# Altium PCB Connector to Connector.PcbDoc
Units mil, origin at the board's own origin, x right, y up, seen from the top; angles counter-clockwise.
Board outline 5065 x 3395 mil, 2 copper layers (Top Layer, Bottom Layer); 3 components, 95 nets, 232 pads, 75 vias.
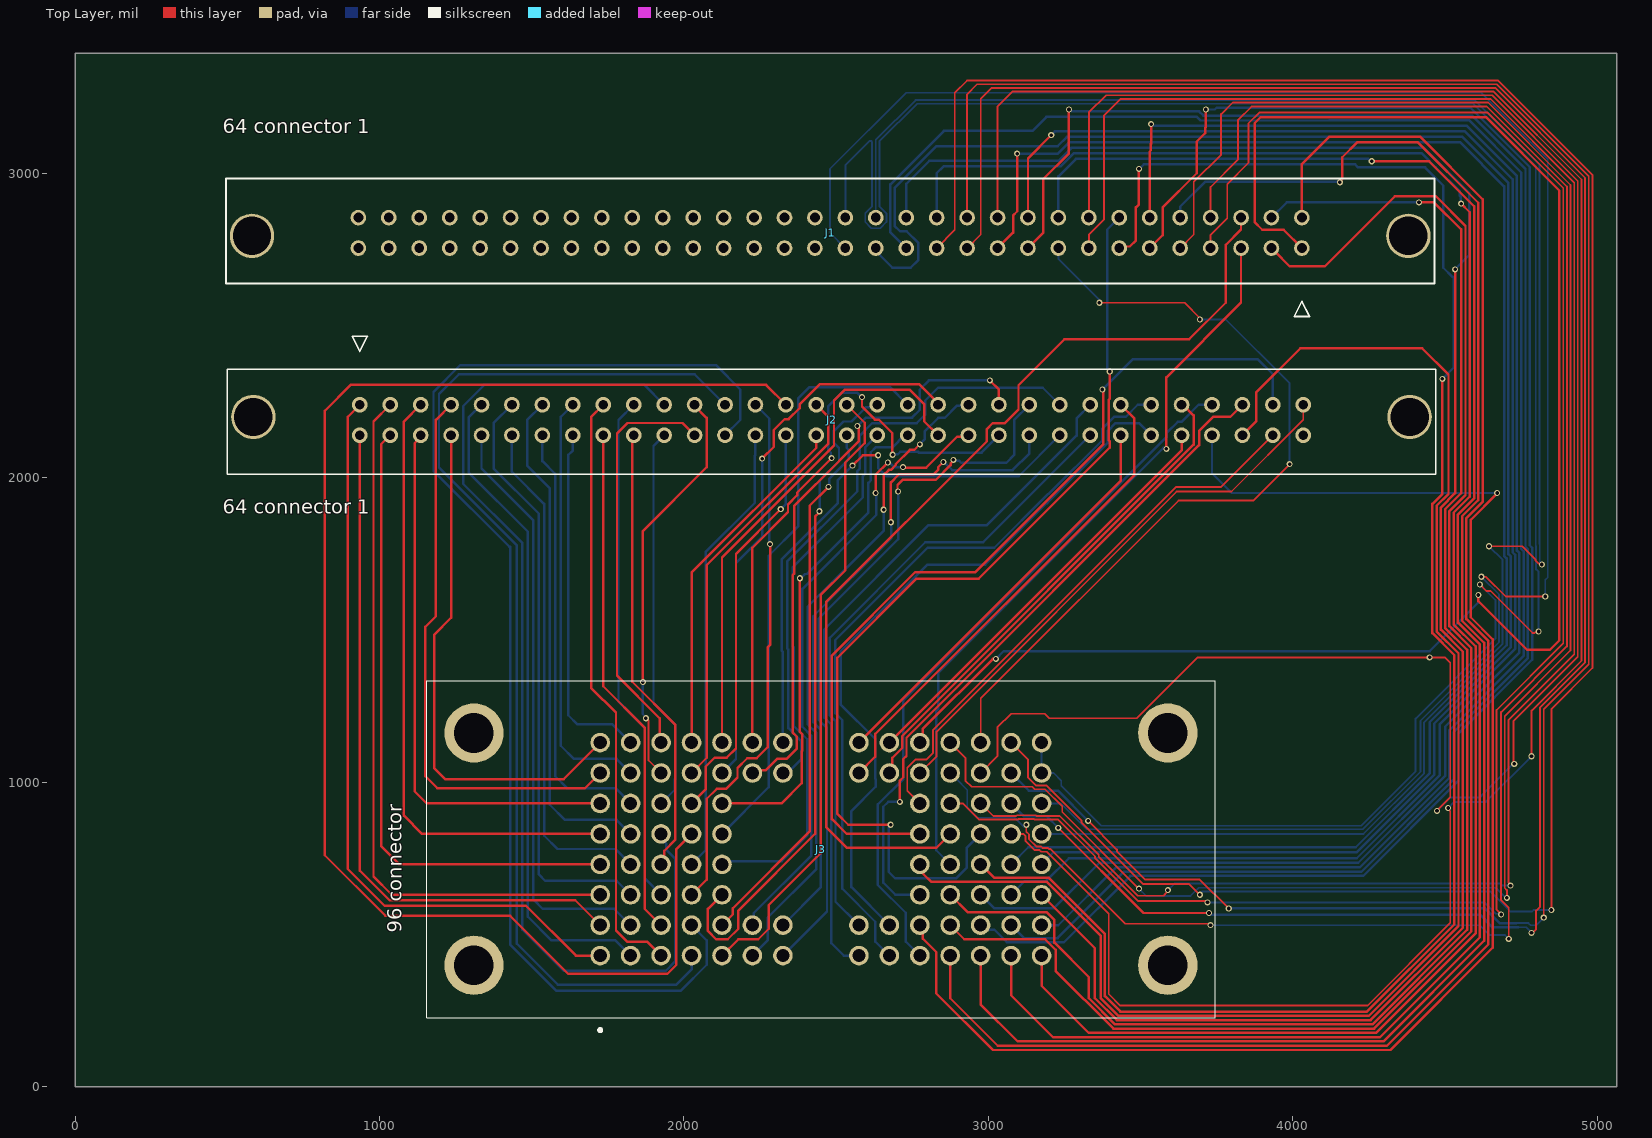
[diagram p0: Top Layer view]
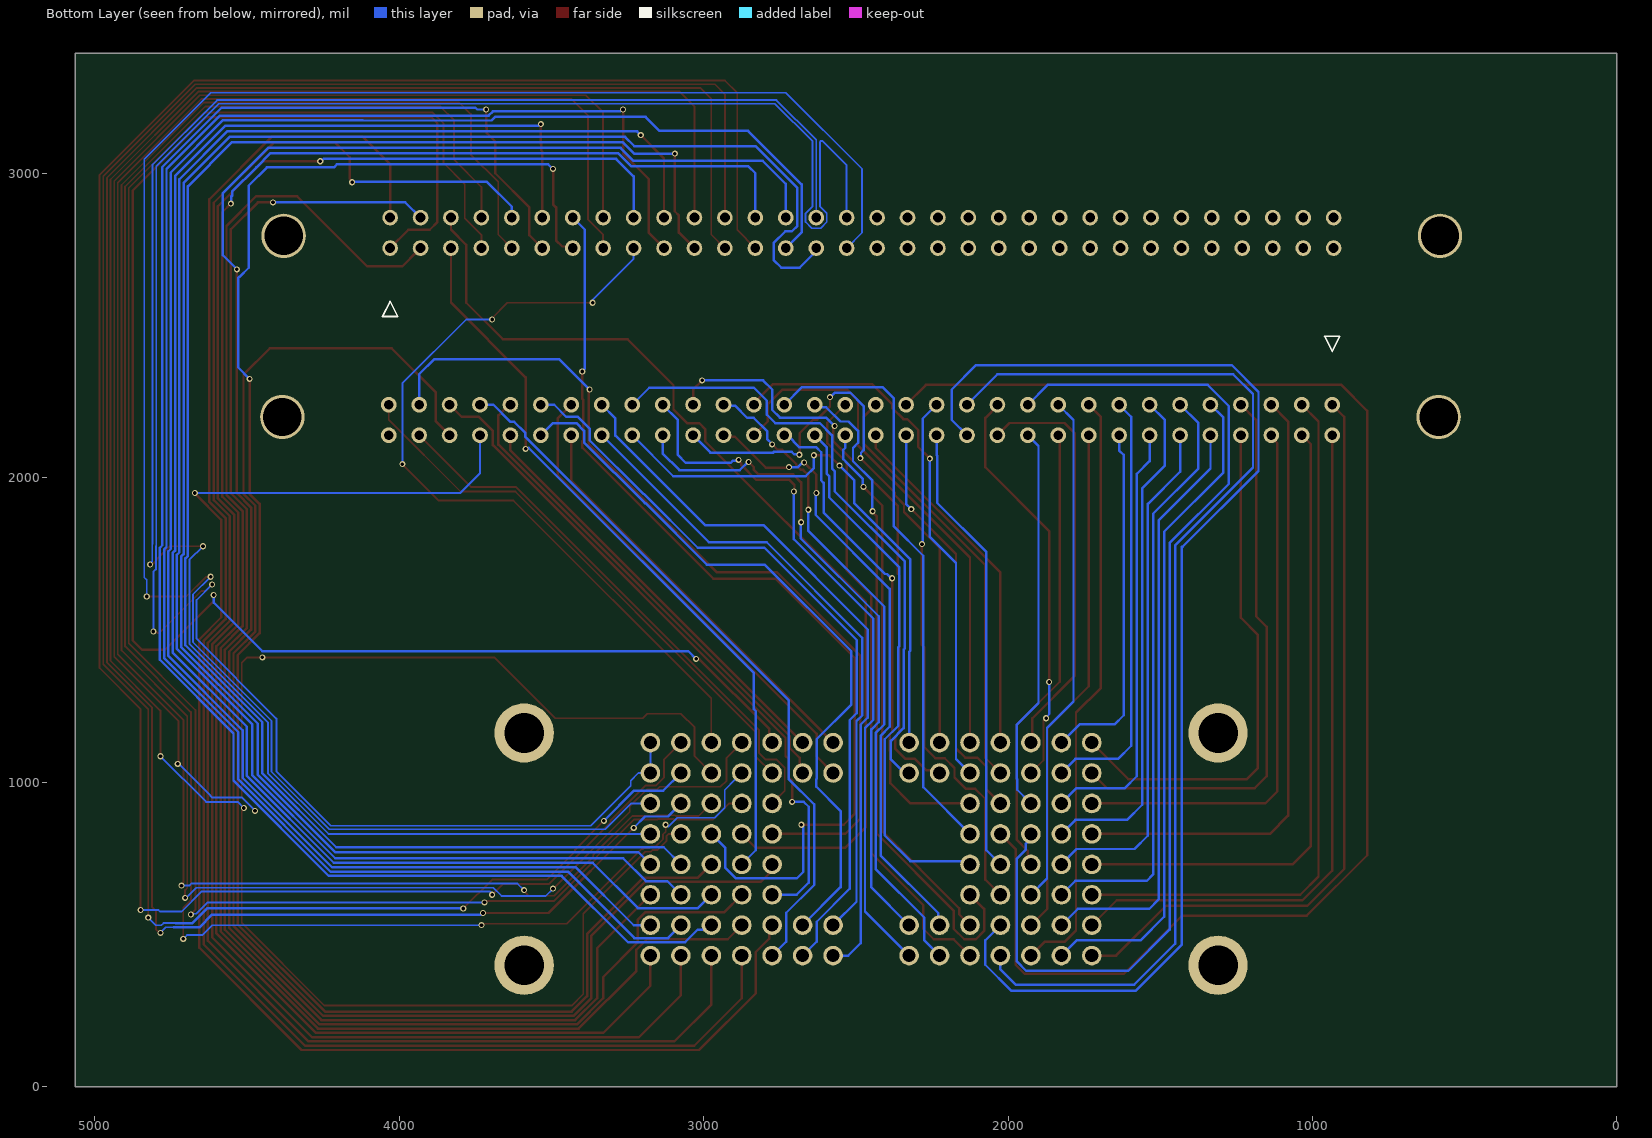
[diagram p1: Bottom Layer view, seen from below]

## Layer stack, top to bottom
Top Solder: solder mask 0.4, Solder Resist, Dk 3.5
Top Layer: signal copper 1.4
Dielectric 1: dielectric 12.6, FR-4, Dk 4.8
Bottom Layer: signal copper 1.4
Bottom Solder: solder mask 0.4, Solder Resist, Dk 3.5

## Board outline
0,0 5065,0 5065,3395 0,3395

## Design rules (kind name [scope] priority, off if disabled: settings)
Clearance [All] p1: gap=6 ignorepadtopadclearanceinfootprint=FALSE
PolygonConnect [All] p1: connectstyle=Relief reliefconductorwidth=10 reliefentries=4 polygonreliefangle="90 Angle" airgapwidth=10
RoutingVias [All] p1: holewidth=12 width=20 viastyle="Through Hole" minholewidth=12 minwidth=20 maxholewidth=12 maxwidth=20
SolderMaskExpansion [All] p1: expansion=4 istentingtop=FALSE
Width [All] p1: maxlimit=8 minlimit=6 preferedwidth=8
30 further rules are at their usual default settings.

## Classes and differential pairs
component class "Connector to Connector": J1 J3

## Components (designator, comment, footprint, x,y, rotation, side; value= is the part's Value field where it differs from the comment)
J1 "XG4A-6431" CONN_XG4A-6431_OMR 930.39,2854.84 r180 top
J2 "XG4A-6431" CONN_XG4A-6431_OMR 4035,2140 r0 top
J3 "DL2-96RW6B" DL296RW6B 1725,430 r90 top

## Footprints (in the part's own frame and the unit in brackets; to place one, negate y for a bottom-side part, rotate by r counter-clockwise, add the part's x,y. Pads: shape width x height; smd on the part's side, far side on the other; paste and mask are expansions set on the pad)
CONN_XG4A-6431_OMR [mil]
  round 51.5 / inner round 60 / far side round 51.5 hole 32 paste-25.75 mask+0: 1(-3100,100) 2(-3100,0) 3(-3000,100) 4(-3000,0) 5(-2900,100) 6(-2900,0) 7(-2800,100) 8(-2800,0) 9(-2700,100) 10(-2700,0) 11(-2600,100) 12(-2600,0) 13(-2500,100) 14(-2500,0) 15(-2400,100) 16(-2400,0) 17(-2300,100) 18(-2300,0) 19(-2200,100) 20(-2200,0) 21(-2100,100) 22(-2100,0) 23(-2000,100) 24(-2000,0) 25(-1900,100) 26(-1900,0) 27(-1800,100) 28(-1800,0) 29(-1700,100) 30(-1700,0) 31(-1600,100) 32(-1600,0) 33(-1500,100) 34(-1500,0) 35(-1400,100) 36(-1400,0) 37(-1300,100) 38(-1300,0) 39(-1200,100) 40(-1200,0) 41(-1100,100) 42(-1100,0) 43(-1000,100) 44(-1000,0) 45(-900,100) 46(-900,0) 47(-800,100) 48(-800,0) 49(-700,100) 50(-700,0) 51(-600,100) 52(-600,0) 53(-500,100) 54(-500,0) 55(-400,100) 56(-400,0) 57(-300,100) 58(-300,0) 59(-200,100) 60(-200,0) 61(-100,100) 62(-100,0) 63(0,100) 64(0,0)
  round 145.98 / inner round 60 / far side round 145.98 hole 126 paste-72.99 mask-73: 65(-3449.61,59.84) 66(349.61,59.84)
  silkscreen extent -3535,-128 435,325
DL296RW6B [mm]
  round 1.635 hole 1.09: A1(0,0) A2(2.54,0) A3(5.08,0) A4(7.62,0) A5(10.16,0) A6(12.7,0) A7(15.24,0) A8(17.78,0) B1(0,-2.54) B2(2.54,-2.54) B3(5.08,-2.54) B4(7.62,-2.54) B5(10.16,-2.54) B6(12.7,-2.54) B7(15.24,-2.54) B8(17.78,-2.54) C1(0,-5.08) C2(2.54,-5.08) C3(5.08,-5.08) C4(7.62,-5.08) C5(10.16,-5.08) C6(12.7,-5.08) C7(15.24,-5.08) C8(17.78,-5.08) D1(0,-7.62) D2(2.54,-7.62) D3(5.08,-7.62) D4(7.62,-7.62) D5(10.16,-7.62) D6(12.7,-7.62) D7(15.24,-7.62) D8(17.78,-7.62) E1(0,-10.16) E2(2.54,-10.16) E3(5.08,-10.16) E4(7.62,-10.16) E5(10.16,-10.16) E6(12.7,-10.16) E7(15.24,-10.16) E8(17.78,-10.16) F1(0,-12.7) F2(2.54,-12.7) F7(15.24,-12.7) F8(17.78,-12.7) G1(0,-15.24) G2(2.54,-15.24) G7(15.24,-15.24) G8(17.78,-15.24) H1(0,-21.59) H2(2.54,-21.59) H7(15.24,-21.59) H8(17.78,-21.59) J1(0,-24.13) J2(2.54,-24.13) J7(15.24,-24.13) J8(17.78,-24.13) K1(0,-26.67) K2(2.54,-26.67) K3(5.08,-26.67) K4(7.62,-26.67) K5(10.16,-26.67) K6(12.7,-26.67) K7(15.24,-26.67) K8(17.78,-26.67) L1(0,-29.21) L2(2.54,-29.21) L3(5.08,-29.21) L4(7.62,-29.21) L5(10.16,-29.21) L6(12.7,-29.21) L7(15.24,-29.21) L8(17.78,-29.21) M1(0,-31.75) M2(2.54,-31.75) M3(5.08,-31.75) M4(7.62,-31.75) M5(10.16,-31.75) M6(12.7,-31.75) M7(15.24,-31.75) M8(17.78,-31.75) N1(0,-34.29) N2(2.54,-34.29) N3(5.08,-34.29) N4(7.62,-34.29) N5(10.16,-34.29) N6(12.7,-34.29) N7(15.24,-34.29) N8(17.78,-34.29) P1(0,-36.83) P2(2.54,-36.83) P3(5.08,-36.83) P4(7.62,-36.83) P5(10.16,-36.83) P6(12.7,-36.83) P7(15.24,-36.83) P8(17.78,-36.83)
  round 4.95 hole 3.3: MH1(-0.8,-47.37) MH2(18.58,-47.37) MH3(18.58,10.54) MH4(-0.8,10.54)
  silkscreen extent -6.31,-51.32 22.95,14.49

## Part data
J1 J2: "No Description Available", Mfr_Name=Omron, Copyright="Copyright (C) 2023 Ultra Librarian. All rights reserved.", Manufacturer_Part_Number=XG4A-6431, RefDes=RefDes, Type=DEV
J3: "Conn Rectangular SKT 96 POS 2.54mm Solder ST Thru-Hole Automotive", Manufacturer_Name="ITT CANNON", Arrow Part Number=DL2-96RW6B, Arrow Price/Stock=https://www.arrow.com/en/products/dl2-96rw6b/itt-corporation?region=nac, Datasheet Link=http://www.farnell.com/datasheets/1992568.pdf, Geometry.Height=25.2mm, Manufacturer_Part_Number=DL2-96RW6B

## Via types
v1: diameter 20, hole 12, Top Layer to Bottom Layer, 75 vias

## Nets (pads, with @x,y where several pads share a name; then routed paths per layer and width w, separated by ;. In a path a pad name is that pad's centre, name@x,y a point inside that pad or via, vN(x,y) a via of type N, cw(c..) or ccw(c..) an arc to the next point about the centre after c; other vN are vias at no path point)
1: J2.1 J3.A1 | length 2489.3
  Top Layer w8: J2.1 895.25,2200.25 895.25,714.89 1016.14,594 1481,594 1645,430 J3.A1
2: J2.2 J3.A2 | length 2294.8
  Top Layer w8: J2.2 935,709.54 1032.54,612 1643,612 J3.A2
3: J2.3 J3.A3 | length 2342.6
  Top Layer w8: J2.3 980,2185 980,690 1040,630 J3.A3
4: J2.4 J3.A4 | length 2107.3
  Top Layer w8: J2.4 1005,2110 1005,790 1065,730 J3.A4
5: J2.5 J3.A5 | length 2042.6
  Top Layer w8: J2.5 1080,2185 1080,890 1140,830 J3.A5
6: J2.6 J3.A6 | length 1823.1
  Top Layer w8: J2.6 1135,2133.56 1115,2113.56 1115,970 1155,930 1705,930 1710,935 1725,920 J3.A6
7: J2.7 J3.A7 | length 1867.5
  Top Layer w8: J2.7 1185,2190 1185,1545 1150,1510 1150,1020 1190,980 1675,980 J3.A7
8: J2.8 J3.A8 | length 1727
  Top Layer w8: J2.8 1235,1540 1180,1485 1180,1045 1215,1010 1605,1010 J3.A8
9: J2.9 J3.B1 | length 2171
  Bottom Layer w8: J2.9 1292.75,2197.75 1292.75,2017.25 1487.25,1822.75 1487.25,557.75 1565,480 1775,480 J3.B1
10: J2.10 J3.B2 | length 1950.6
  Bottom Layer w8: J2.10 1335,2030 1505.25,1859.75 1505.25,614.75 1536.19,583.81 1771.19,583.81 J3.B2
11: J2.11 J3.B3 | length 1959.1
  Bottom Layer w8: J2.11 1374.75,2179.75 1374.75,2030.25 1523.25,1881.75 1523.25,696.75 1543.81,676.19 1778.81,676.19 J3.B3
12: J2.12 J3.B4 | length 1682.8
  Bottom Layer w8: J2.12 1435,2020 1540.61,1914.39 1540.61,1889.85 1541.25,1889.21 1541.25,823.75 1584.61,780.39 1774.61,780.39 J3.B4
13: J2.13 J3.B5 | length 1671.1
  Bottom Layer w8: J2.13 1485,2190 1485,2040 1558.61,1966.39 1558.61,1897.3 1559.25,1896.66 1559.25,925.75 1608.81,876.19 1778.81,876.19 J3.B5
14: J2.14 J3.B6 | length 1422.9
  Bottom Layer w8: J2.14 1535,2055 1576.61,2013.39 1576.61,1904.76 1577.25,1904.12 1577.25,1019.36 1616.21,980.39 1774.61,980.39 J3.B6
15: J2.15 J3.B7 | length 1403.6
  Bottom Layer w8: J2.15 1595.25,2200.25 1595.25,1119.75 1638.81,1076.19 1778.81,1076.19 J3.B7
16: J2.16 J3.B8 | length 1168.5
  Bottom Layer w8: J2.16 1635,2090 1620,2075 1620,1220 1650,1190 1765,1190 J3.B8
17: J2.17 J3.C1 | length 1959.9
  Top Layer w8: J2.17 1695.25,2200.25 1695.25,1309.75 1776.75,1228.25 1776.75,512.93 1813.5,476.19 1878.81,476.19 J3.C1
18: J2.18 J3.C2 | length 1688.7
  Top Layer w8: J2.18 1735,1315 1870.81,1179.19 1870.81,584.19 J3.C2
19: J2.19 J3.C3 | length 1698.7
  Top Layer w8: J3.C3@1915,630 J3.C3
  Bottom Layer w8: J2.19 1785,2190 1785,1265 1872,1178 1872,683 J3.C3
20: J2.20 J3.C4 | length 1496.5
  Top Layer w8: J2.20 1830.32,2135.32 1830.32,1329.68 1971.19,1188.82 1971.19,810.13 1935.24,774.19 1935.24,740.24 J3.C4
  Bottom Layer w8: J3.C4@1920,735 J3.C4
21: J2.21 J3.C5 | length 3537.6
  Top Layer w8: J3.C5@1925,818.19 J3.C5
  Bottom Layer w8: J3.C5 1925,814.75 1941.34,798.4 1941.34,778.97 1971.19,749.13 1971.19,410.87 1940.32,380 1605,380 1469.25,515.75 1469.25,1785.18 1274.75,1979.68 1274.75,2235.96 1343.79,2305 1870,2305 J2.21
22: J2.22 J3.C6 | length 1276
  Bottom Layer w8: J3.C6 1925,935 1930,935 1970,975 1970,1009.68 1971.19,1010.87 1971.19,1188.81 1900,1260 1900,2105 J2.22
23: J2.23 J3.C7 | length 1343.2
  Top Layer w6: v1(1875,1210) 1883.81,1201.19 1883.81,1071.19 J3.C7
  Top Layer w8: v1(1865,1328.94) 1865,1825 2074.75,2034.75 2074.75,2196.86 2035,2236.61 J2.23
  Bottom Layer w6: 1865,1224.69 1865,1223.79 1875,1213.79 v1(1875,1210)
  Bottom Layer w8: 1865,1224.69 v1(1865,1328.94) ; J3.C7@1920,1030 J3.C7
24: J2.24 J3.C8 | length 1361.1
  Top Layer w8: J3.C8 1920.5,1134.5 1920.5,1209.5 1780,1350 1780,2145 1815,2180 1995,2180 J2.24
25: J2.25 J3.D1 | length 3614.9
  Bottom Layer w8: J3.D1 2025,385 1975,335 1585.46,335 1451.25,469.21 1451.25,1777.73 1195.25,2033.73 1195.25,2274.79 1260.46,2340 2035,2340 J2.25
26: J2.26 J3.D2 | length 4070.9
  Bottom Layer w8: J3.D2 2025,520 2035,520 2075,480 2075,400 1990,315 1580,315 1430,465 1430,1773.52 1426.48,1773.52 1177.25,2022.75 1177.25,2282.25 1265,2370 2105,2370 2185,2290 2185,2190 J2.26
27: J2.27 J3.D3 | length 1775.8
  Top Layer w8: J3.D3 2030,630 2030,635 2075,680 2075,945.32 2107.78,978.09 2138.41,978.09 2175.95,1015.64 2175.95,1046.27 2208.25,1078.57 2238.89,1078.57 2275,1114.68 2275,1442.76 2282.96,1450.72 v1(2282.96,1782.04)
  Bottom Layer w8: J2.27 2281,2194 2281,1996.62 2280.66,1996.28 2280.66,1784.34 v1(2282.96,1782.04)
28: J2.28 J3.D4 | length 1497
  Bottom Layer w8: J3.D4 2071.19,776.19 2071.19,1756.19 2233,1918 2233,2072.94 2235,2074.94 J2.28
29: J2.29 J3.D5 | length 4816.8
  Top Layer w8: J3.D5 1975,780 1975,400 1945,370 1620,370 1428.94,561.06 1018.94,561.06 820,760 820,2220 905,2305 2270,2305 J2.29
30: J2.30 J3.D6 | length 1361.8
  Top Layer w8: J3.D6 2071.19,976.19 2071.19,1050.73 2100.46,1080 2140.32,1080 2171.19,1110.87 2171.19,1750.13 v1(2318.03,1896.97)
  Bottom Layer w8: v1(2318.03,1896.97) 2335,1913.94 J2.30
31: J2.31 J3.D7 | length 1412.8
  Top Layer w8: J3.D7 2075,1080 2075,1713.34 2474.75,2113.09 2474.75,2200.25 J2.31
32: J2.32 J3.D8 | length 1189.8
  Top Layer w8: J3.D8 2025,1688.79 2435,2098.79 J2.32
  Bottom Layer w8: J3.D8 J3.D8@2035,1130
33: J2.33 J3.E1 | length 2067
  Top Layer w8: J3.E1 2178.81,483.81 2244.13,483.81 2278.81,518.5 2278.81,596.16 2449,766.34 2449,1614.46 2530,1695.46 2530,2049.94 2594,2113.94 2594,2181 J2.33
34: J2.34 J3.E2 | length 1784.8
  Top Layer w8: J3.E2 2160.81,565.81 2160.81,585.81 2413,838 2413,1908 v1(2475,1970)
  Bottom Layer w8: v1(2475,1970) 2477,1972 2477,1996.54 2527.53,2047.07 2527.53,2047.47 2541,2060.94 2541,2091.98 2535,2097.98 J2.34
35: J2.35 J3.E3 | length 2221.1
  Top Layer w8: J3.E3 2078.81,583.81 2078.81,510.87 2105.87,483.81 2144.13,483.81 2178.81,518.5 2178.81,578.36 2431,830.54 2431,1872.89 2445,1886.89 v1(2445,1890)
  Bottom Layer w8: v1(2445,1890) 2446,1891 2446,1991 2509.53,2054.53 2509.53,2098.36 2492.75,2115.14 2492.75,2153.96 2523.79,2185 2551.06,2185 2597.74,2231.68 2626.68,2231.68 J2.35
36: J2.36 J3.E4 | length 1769.4
  Bottom Layer w8: J3.E4 2135.79,740.79 2320.79,740.79 2405,825 2405,1140.77 2361,1184.77 2361,1442.86 2357,1446.86 2357,1704.94 2588,1935.94 2588,2005.5 2596,2013.5 2596,2101 J2.36
37: J2.37 J3.E5 | length 1933.1
  Bottom Layer w8: J3.E5 2278.81,983.81 2278.81,1743.96 2375,1840.15 2375,2260 2412.75,2297.75 2677.25,2297.75 J2.37
38: J2.38 J3.E6 | length 1627
  Top Layer w8: J3.E6 2320,930 2387,997 2387,1101.23 2389.19,1103.41 2389.19,1156.59 2381,1164.77 v1(2381,1670)
  Bottom Layer w8: v1(2381,1670) 2384.25,1670 2398.13,1683.88 2403.88,1683.88 2606,1886 2606,1983.4 2614,1991.4 2614,2084 2630,2100 2684.91,2100 2724.91,2140 J2.38
39: J2.39 J3.E7 | length 1847.3
  Top Layer w8: v1(2257,2063) 2295.25,2101.25 2295.25,2156.46 2331.35,2192.56 2343.78,2192.56 2379.88,2228.66 2379.88,2241.09 2445.79,2307 2773.46,2307 2835,2245.46 J2.39
  Bottom Layer w8: J3.E7 2120,1035 2130,1035 2171.19,1076.19 2171.19,1720.13 2257,1805.94 v1(2257,2063)
40: J2.40 J3.E8 | length 1727.7
  Top Layer w8: J3.E8 2125,1737.88 2493,2105.88 2493,2254.21 2527.79,2289 2742.21,2289 2789.07,2242.14 2789.07,2185.93 J2.40
41: J2.41 J3.F1 | length 2175.2
  Top Layer w8: v1(2656,1895) 2656,2008.77 2673.23,2026 2679.94,2026 2696,2042.06 2696,2044.94 2742.63,2091.57 2756.57,2091.57 v1(2775,2110)
  Bottom Layer w8: J3.F1 2230,430 2230,435 2275,480 2275,554.54 2435,714.54 2435,1161.68 2407,1189.68 2407,1576.54 2656,1825.54 v1(2656,1895) ; v1(2775,2110) 2791.93,2126.93 2791.93,2153.14 2835.64,2196.86 2856.86,2196.86 2897.25,2237.25 2932.25,2237.25 J2.41
42: J2.42 J3.F2 | length 2047.2
  Top Layer w8: v1(2630,1950) 2630,2010 v1(2670,2050) ; v1(2720,2035) 2722,2033 2795.61,2033 2897.25,2134.64 2929.64,2134.64 J2.42
  Bottom Layer w8: J3.F2 2229.5,534.5 2229.5,569.5 2419,759 2419,1152.23 2389,1182.23 2389,1635.06 2632,1878.06 2632,1948 v1(2630,1950) ; v1(2670,2050) 2675.46,2050 2690.46,2035 v1(2720,2035)
43: J2.43 J3.F7 | length 1965.9
  Top Layer w8: J3.F7 2235,1030 2244.5,1039.5 2269.19,1039.5 2305.87,1076.19 2336.5,1076.19 2371.19,1110.87 2371.19,1149.13 2357,1163.32 2357,1679.94 2362,1684.94 2362,1907 2509.53,2054.53 2509.53,2054.93 2575,2120.4 2575,2165 v1(2570,2170) ; v1(3005,2320) 3035,2290 J2.43
  Bottom Layer w8: v1(2570,2170) 2597.75,2197.75 2749.75,2197.75 2774.75,2222.75 2774.75,2289.75 2805,2320 v1(3005,2320)
45: J2.44 J3.F8 | length 1983
  Top Layer w8: J3.F8 2235,1130 2225,1140 2225,1770 2342.03,1887.03 2342.03,1912.49 2372,1942.46 2372,1950.94 v1(2485.53,2064.47) ; v1(2585,2265) 2585,2233.79 2627.64,2191.15 2640.07,2191.15 2685,2146.21 2685,2076.21 v1(2685.56,2075.65)
  Bottom Layer w8: v1(2485.53,2064.47) 2483.23,2066.77 2483.23,2082.24 2474.75,2090.72 2474.75,2235.96 2518.54,2279.75 2568.64,2279.75 2583.39,2265 v1(2585,2265) ; v1(2685.56,2075.65) 2686.73,2076.82 2702.69,2076.82 2710.88,2085 2770,2085 2772.03,2082.97 2977.97,2082.97 J2.44
46: J2.45 J3.G1 | length 2349.9
  Top Layer w8: v1(2704,1955) 2701.7,1957.3 2701.7,1976.54 2718.16,1993 2827.54,1993 2876.28,2041.73 2876.28,2046.97 2885.03,2055.72 v1(2885.03,2058.97)
  Bottom Layer w8: J3.G1 2470,575 2470,1177.59 2443,1204.59 2443,1537.54 2704,1798.54 v1(2704,1955) ; v1(2885.03,2058.97) 2887.33,2056.67 2903.36,2056.67 2911.03,2049 3059,2049 3085,2075 3085,2190 J2.45
47: J2.46 J3.G2 | length 2204.2
  Top Layer w8: v1(2680,1853.94) 2680,1985 2706,2011 2820.09,2011 2835.03,2025.95 2835.03,2034.43 v1(2852.28,2051.67)
  Bottom Layer w8: J3.G2 2449,654 2449,1173.14 2425,1197.14 2425,1545 2681,1801 2681,1852.94 v1(2680,1853.94) ; v1(2852.28,2051.67) 2855.09,2051.67 2881.76,2025 3080,2025 3135,2080 J2.46
48: J2.47 J3.G7 | length 2033.1
  Bottom Layer w8: J3.G7 2340,1030 2385,1075 2385,1135.32 2343,1177.32 2343,1435.4 2339,1439.4 2339,1724.6 2570,1955.6 2570,2022.06 2578,2030.06 2578,2139.21 2618.54,2179.75 2764.75,2179.75 2792.75,2207.75 2792.75,2253.96 2834.79,2296 3179,2296 J2.47
49: J2.48 J3.G8 | length 1812.4
  Top Layer w8: v1(2554,2040) 2588.06,2074.06 v1(2638,2074.06)
  Bottom Layer w8: J3.G8 2325,1427.94 2321,1431.94 2321,1732.06 2505,1916.06 2505,1991 v1(2554,2040) ; v1(2638,2074.06) 2638,2032 2665,2005 3100,2005 J2.48
50: J2.49 J3.H1 | length 2360.7
  Bottom Layer w8: J3.H1 2525,430 2484,471 2484,1189.05 2461,1212.05 2461,1501.31 2804.11,1844.42 2995.64,1844.42 3290,2138.79 3290,2195 J2.49
51: J2.50 J3.H2 | length 2118.6
  Bottom Layer w8: J3.H2 2570,530 2570,535 2498,607 2498,1200.51 2479,1219.51 2479,1474 2793,1788 2983,1788 J2.50
52: J2.51 J3.H7 | length 1603.5
  Top Layer w8: J3.H7 2628.81,1083.81 2628.81,1158.36 3480,2009.54 3480,2195 J2.51
53: J2.52 J3.H8 | length 1366.2
  Top Layer w8: J3.H8 3435,1990 J2.52
54: J2.53 J3.J1 | length 2490.8
  Bottom Layer w8: J3.J1 2628.81,476.19 2628.81,541.5 2520,650.32 2520,1203.96 2497,1226.96 2497,1466.54 2800.46,1770 3019.54,1770 3196.31,1946.77 3197.98,1946.77 3374.75,2123.54 3374.75,2161.42 3413.58,2200.25 3451.46,2200.25 3491.21,2240 J2.53
55: J2.54 J3.J2 | length 2401.8
  Bottom Layer w8: J3.J2 2550,655 2550,904.69 2630,984.69 2630,1009.68 2628.81,1010.87 2628.81,1141.5 2515,1255.32 2515,1430 2800,1715 2990,1715 3191.66,1916.66 3193.34,1916.66 3392.75,2116.08 3392.75,2153.96 3418.54,2179.75 3495.25,2179.75 J2.54
56: J2.55 J3.J7 | length 1643.5
  Top Layer w8: J3.J7 2684.5,1039.5 2684.5,1079.84 2717.19,1112.53 2717.19,1151.64 3674.75,2109.21 3674.75,2205.25 3640,2240 J2.55
57: J2.56 J3.J8 | length 1412.6
  Top Layer w8: J3.J8@2670,1130 J3.J8 3635,2090 J2.56
58: J2.57 J3.K1 | length 2354.9
  Bottom Layer w8: J3.K1 2728.81,476.19 2728.81,570.73 2637,662.54 2637,926.68 2721.19,1010.87 2721.19,1269.97 3587.04,2135.82 3587.04,2148.25 3622.61,2183.82 3635.04,2183.82 3691.21,2240 J2.57
59: J2.58 J3.K2 | length 4939.3
  Top Layer w8: J3.K2 2784.5,520.5 2784.5,485.81 2828.81,441.5 2828.81,306.19 3015,120 4320.91,120 4657,456.09 4657,1469.72 4585,1541.72 4585,1861.89 4672,1948.89 v1(4672,1950)
  Bottom Layer w8: J2.58 3735,2015 3800,1950 v1(4672,1950)
60: J2.59 J3.K3 | length 2250.8
  Top Layer w8: v1(2709.63,935.37) 2709.63,1004.97 2720.81,1016.16 2720.81,1075.82 2731.19,1086.19 2731.19,1145.84 3692.75,2107.41 3692.75,2153.96 3738.79,2200 3795,2200 J2.59
  Bottom Layer w8: v1(2709.63,935.37) 2671.14,935.37 2655,919.23 2655,670 2695,630 J3.K3
61: J2.60 J3.K4 | length 4974.3
  Top Layer w8: J3.K4 2785.79,719.21 2785.79,699.21 2812.81,672.19 3192.47,672.19 3368.97,495.69 3368.97,291.24 3428.2,232 4250.18,232 4545,526.82 4545,1423.32 4473,1495.32 4473,1908.28 4512,1947.28 4512,2338.94 4425.94,2425 4025,2425 3880,2280 3880,2185 J2.60
62: J2.61 J3.K5 | length 2929.1
  Top Layer w8: J3.K5 2535,830 2486.19,878.81 2486.19,1008.81 2485,1010 2485,1415 2760,1690 2957.54,1690 3377.25,2109.71 3377.25,2287.75 v1(3375,2290)
  Bottom Layer w8: v1(3375,2290) 3475,2390 3885,2390 3935,2340 J2.61
63: J2.62 J3.K6 | length 1832.6
  Top Layer w6: J3.K6 2733.81,971.19 2733.81,1047.06 2761.57,1074.81 2797.86,1074.81 2818,1094.96 2818,1171.13 3616.87,1970 3765,1970 J2.62
64: J2.63 J3.K7 | length 1837.5
  Top Layer w6: J3.K7 2830,1085 2830,1166.16 3618.84,1955 3799.14,1955 4035,2190.86 J2.63
65: J1.1 J3.K8 | length 5543.9
  Top Layer w8: J3.K8@2775,1135 J3.K8 2784.19,1139.19 2784.19,1174.19 3015,1405 v1(3025,1405) ; J1.1 3970.24,2815 3900,2815 3875,2840 3875,3165 3895,3185 4635,3185 4876,2944 4876,1466 4845,1435 4770,1435 4610,1595 v1(4610,1615)
  Bottom Layer w8: v1(3025,1405) 3050,1430 4450,1430 4610,1590 v1(4610,1615)
66: J1.2 J3.L1 | length 5502.1
  Top Layer w8: J3.L1 2875,290 3031,134 4309.46,134 4643,467.54 4643,1463.92 4571,1535.92 4571,1867.69 4624,1920.69 4624,2915.14 4418.14,3121 4121,3121 4030.39,3030.39 J1.2
67: J1.3 J3.L2 | length 5193.9
  Top Layer w8: J3.L2 2921.19,483.81 3186.5,483.81 3221.19,449.13 3221.19,379.62 3410.8,190 4267.58,190 4587,509.42 4587,1440.72 4515,1512.72 4515,1890.88 4568,1943.88 4568,2827.46 4470.46,2925 4335.9,2925 4105.9,2695 3990.24,2695 3940.24,2745 3940,2745 3930.39,2754.61 J1.3
68: J1.4 J3.L3 | length 5121.6
  Top Layer w8: J3.L3 2932.81,572.19 3192.47,572.19 3217.19,547.47 3217.19,472.93 3330.29,359.82 3330.29,290.31 3416.6,204 4261.78,204 4573,515.22 4573,1434.92 4501,1506.92 4501,1896.68 4554,1949.68 4554,2816 4465,2905 v1(4415,2905)
  Bottom Layer w8: J1.4 3980.55,2905 v1(4415,2905)
69: J1.5 J3.L4 | length 2469.4
  Top Layer w8: v1(3585,2095) 3585,2330 3830.39,2575.39 J1.5
  Bottom Layer w8: J3.L4 2828.81,776.19 2828.81,1233.81 2835,1240 2835,1358.33 3575.02,2098.35 3576.08,2097.3 3582.7,2097.3 v1(3585,2095)
70: J1.6 J3.L5 | length 3286
  Top Layer w8: J3.L5 2828.81,783.81 2536.19,783.81 2467,853 2467,1592 2995.25,2120.25 2995.25,2160.25 3014.75,2179.75 3054.75,2179.75 3099.25,2224.25 3099.25,2304.25 3250,2455 3660,2455 3780,2575 3780,2765 3830.39,2815.39 J1.6
71: J1.7 J3.L6 | length 6063.3
  Top Layer w6: J3.L6 2916.76,930 2969.94,876.81 3097.03,876.81 3099.22,879 3150.78,879 3152.97,876.81 3230.06,876.81 3351.08,755.79 3351.08,750.08 3491.16,610 3715,610 v1(3720,605) ; J1.7 3730.39,2798.77 3785,2853.38 3785,2965 3855,3035 3855,3165 3890,3200 4641.06,3200 4889,2952.06 4889,1456 4670,1237 4670,581.11 4685,566.11 v1(4685,565)
  Bottom Layer w6: v1(3720,605) 4630,605 4667.32,567.68 4682.32,567.68 v1(4685,565)
72: J1.8 J3.L7 | length 6269.9
  Top Layer w6: v1(3125,860) 3125,836.97 3133.81,828.16 3133.81,812.94 3157.94,788.81 3173.16,788.81 3178.79,783.19 3197.03,783.19 3200.22,780 3205,780 3450,535 3725,535 v1(3730,530) ; J1.8 3730.39,2955.39 3820,3045 3820,3175 3865,3220 4638.03,3220 4901,2957.03 4901,1446 4685,1230 4685,612.13 4710,587.13 v1(4710,485)
  Bottom Layer w6: J3.L7 2875,1015 2880,1010 2880.93,1010.93 2894.07,1010.93 2930.87,974.13 2930.87,915.89 2963.81,882.94 3087.06,882.94 3116.51,853.49 3123.03,860 v1(3125,860) ; v1(3730,530) 4615,530 4647.73,497.27 4697.73,497.27 v1(4710,485)
73: J1.9 J3.L8 | length 6323.5
  Top Layer w6: J3.L8 2925,1080 2925,1005 2945,985 3144.78,985 3152.97,976.81 3186.43,976.81 3243,920.24 3243,902 v1(3495,650) ; J1.9 3675,2799.45 3675,2972.07 3765,3062.07 3765,3195 3803,3233 4642,3233 4913,2962 4913,1433 4697,1217 4697,652.13 4704,645.13 v1(4704,620)
  Bottom Layer w6: v1(3495,650) 3519,626 3664.13,626 3691.13,653 4667.21,653 4700.21,620 v1(4704,620)
74: J1.10 J3.M1 | length 5708.1
  Top Layer w8: J3.M1 2975,270 3097,148 4298,148 4629,479 4629,1458.12 4557,1530.12 4557,1873.49 4610,1926.49 4610,2903.69 4410.69,3103 4213,3103 4163.11,3053.11 4163.11,2981.69 4155,2973.57 v1(4155,2971)
  Bottom Layer w8: J1.10 3630.39,2890.39 3712,2972 4154,2972 v1(4155,2971)
75: J1.11 J3.M2 | length 5621.9
  Top Layer w8: J3.M2 J3.M2@2985,530 ; J1.11 3572.64,2797.09 3572.64,2888.1 3685,3000.46 3685,3105 3712.7,3132.7 3712.7,3149.7 3715,3152 v1(3715,3210)
  Bottom Layer w8: J3.M2 2990.25,530 3005.25,515 3020,515 3061.19,473.81 3248.81,473.81 3467,692 3830.1,692 3830.3,691.8 4231.8,691.8 4545,1005 4545,1160 4787,1402 4787,1770.18 4779,1778.18 4779,3020.96 4583.96,3216 3750,3216 3744,3210 v1(3715,3210)
76: J1.12 J3.M3 | length 5387.1
  Top Layer w8: J3.M3 J3.M3@2980,630 ; J1.12 3530.39,3072 3534.39,3076 3534.39,3097.39 3535,3098 v1(3535,3162)
  Bottom Layer w8: J3.M3 3018.81,586.19 3216.19,586.19 3365,735 4215.6,735 4501,1020.4 4501,1181.91 4745,1425.91 4745,1752.78 4737,1760.78 4737,2991.63 4571.63,3157 4128.78,3157 4127.78,3156 3544.25,3156 3538.25,3162 v1(3535,3162)
77: J1.13 J3.M4 | length 5836.2
  Top Layer w8: J3.M4 3018.81,686.19 3198.27,686.19 3382.97,501.49 3382.97,297.03 3434,246 4244.38,246 4531,532.62 4531,1417.53 4459,1489.53 4459,1914.08 4492,1947.08 v1(4492,2325) ; J1.13 3435.55,2760 3465,2760 3485,2780 3485,2888.38 3495,2898.38 v1(3495,3015)
  Bottom Layer w8: v1(3495,3015) 3496.11,3015 3511.11,3030 4205,3030 4215,3020 4435,3020 4495,2960 4495,2690.06 4524.06,2661 4525.31,2661 4530,2656.31 4530,2363 v1(4492,2325)
78: J1.14 J3.M5 | length 3236.3
  Top Layer w8: v1(2679,860) 2540,860 2504.19,895.81 2504.19,1408.73 2764.09,1668.64 2968.64,1668.64 3399,2099 3399,2119.79 3395.25,2123.54 3395.25,2256.46 3399,2260.21 v1(3399,2349) ; J3.M5 J3.M5@2980,835
  Bottom Layer w8: v1(2679,860) 2679,859 2673,853 2673,705 2694.19,683.81 2894.13,683.81 2928.81,718.5 2928.81,783.81 J3.M5 ; v1(3399,2349) 3399,2351.33 3390.64,2359.69 3390.64,2815.09 J1.14
79: J1.15 J3.M6 | length 6433.2
  Top Layer w6: J3.M6 3016.19,888.81 3092.06,888.81 3094.24,891 3155.76,891 3157.94,888.81 3235.03,888.81 3363.08,760.76 3363.08,755.05 3491.13,627 3576,627 3580.24,631.24 3580.24,631.45 3590,641.21 v1(3590,645) ; J1.15 3330.39,2798.77 3380,2848.38 3380,3190 3435,3245 4650,3245 4925,2970 4925,1420 4709,1204 4709,670.51 4716,663.51 v1(4716,660)
  Bottom Layer w6: v1(3590,645) 3612,667 4683.59,667 4690.59,660 v1(4716,660)
80: J1.16 J3.M7 | length 6695.1
  Top Layer w6: J3.M7 3030,1085 3030,1180 3075,1225 3185,1225 3200,1210 3487.93,1210 3687.93,1410 4500,1410 4518,1392 4518,949.72 v1(4474.14,905.86) ; J1.16 3330.39,3200.39 3387,3257 4655.12,3257 4937,2975.12 4937,1412 4725.32,1200.32 4725.32,1062.68 v1(4728,1060)
  Bottom Layer w6: v1(4474.14,905.86) 4518.28,950 4616.49,950 4620,953.51 4620,955 4725,1060 v1(4728,1060)
  other v1: 4450,1410
81: J1.17 J3.M8 | length 2736.4
  Top Layer w6: J3.M8 2975,1275 3625,1925 3870,1925 v1(3990,2045) ; v1(3365,2575) 3645,2575 3695,2525 v1(3695,2520)
  Bottom Layer w6: J3.M8@2965,1145 2975,1135 J3.M8 ; J1.17 3230.39,2719.61 3365,2585 v1(3365,2575) ; v1(3695,2520) 3780,2520 3990,2310 3990,2050 v1(3990,2045)
82: J1.18 J3.N1 | length 5911.3
  Top Layer w8: J3.N1 3075,300 3213,162 4286.54,162 4615,490.46 4615,1452.32 4543,1524.32 4543,1879.28 4596,1932.28 4596,2892.23 4448.23,3040 v1(4260,3040)
  Bottom Layer w8: J3.N1@3070,430 J3.N1 ; J1.18 3230.39,2990.39 3288,3048 4249.31,3048 4257.31,3040 v1(4260,3040)
83: J1.19 J3.N2 | length 5894.4
  Top Layer w8: J3.N2 J3.N2@3075,535 ; J1.19 3180,2804.45 3180,2981.06 3265,3066.06 v1(3265,3210)
  Bottom Layer w8: J3.N2 3117.19,487.81 3227.81,487.81 3446,706 3835.9,706 3836.1,705.8 4226,705.8 4529,1008.8 4529,1163.8 4773,1407.8 4773,1764.38 4765,1772.38 4765,3014.54 4589.54,3190 3706.72,3190 3692.72,3204 3274.25,3204 3268.25,3210 v1(3265,3210)
84: J1.20 J3.N3 | length 5527.5
  Top Layer w8: J1.20 3130.39,3049.39 v1(3207,3126)
  Bottom Layer w8: J3.N3 3075,635 3080,640 3085,640 3120,675 3190,675 3265,750 4210.8,750 4483,1022.2 4483,1190.02 4731,1438.02 4731,1746.98 4723,1754.98 4723,2980.18 4564.18,3139 4136.24,3139 4135.24,3138 3219,3138 v1(3207,3126)
85: J1.21 J3.N4 | length 5548.4
  Top Layer w8: J1.21 3081.35,2805.8 3081.35,2862.02 3095,2875.66 v1(3095,3065)
  Bottom Layer w8: J3.N4 3131.19,786.19 4207.39,786.19 4450,1028.79 4450,1196.62 4703,1449.62 4703,1735.38 4695,1743.38 4695,2957.26 4549.27,3103 4151.15,3103 4150.15,3102 3265.63,3102 3228.63,3065 v1(3095,3065)
86: J1.22 J3.N5 | length 7063.7
  Top Layer w6: J1.22 3030.39,3220.39 3079,3269 4660.09,3269 4949,2980.09 4949,1399 4785,1235 v1(4785,1085) ; J3.N5 3115,830 3121.81,823.19 3121.81,807.97 3152.97,776.81 3168.19,776.81 3173.81,771.19 3192.06,771.19 3395.97,567.28 3395.97,304.03 3434,266 4246,266 4518,538 4518,904.49 4511,911.49 v1(4511,915)
  Bottom Layer w6: v1(4511,915) 4531,935 4635,935 v1(4785,1085)
87: J1.23 J3.N6 | length 7073.3
  Top Layer w6: J1.23 2975,2799.45 2975,3245 3011,3281 4665.06,3281 4961,2985.06 4961,1394.03 4813,1246.03 4813,590.81 4800,577.81 4800,516.21 4788.79,505 v1(4785,505)
  Top Layer w8: v1(3230,850) 3510,570 v1(3725,570)
  Bottom Layer w6: 4740.8,523 4767,523 v1(4785,505)
  Bottom Layer w8: J3.N6 3117.89,887.11 3192.89,887.11 v1(3230,850) ; v1(3725,570) 3728.25,570 3733.25,565 4615,565 4657,523 4740.8,523
88: J1.24 J3.N7 | length 7054.4
  Top Layer w6: J1.24 2930.39,3260.39 2963,3293 4670.03,3293 4973,2990.03 4973,1388 4825,1240 v1(4825,555) ; v1(3327.97,872.97) 3422.63,778.3 3422.63,772.37 3515,680 3695,680 v1(3790,585)
  Bottom Layer w6: 4735,537 4774.61,537 4781.61,530 4800,530 v1(4825,555)
  Bottom Layer w8: J3.N7 3132.81,972.19 3228.75,972.19 v1(3327.97,872.97) ; v1(3790,585) 4631.62,585 4679.62,537 4735,537
89: J1.25 J3.N8 | length 7301
  Top Layer w6: J1.25 2890,2814.45 2890,3265 2930,3305 4675,3305 4985,2995 4985,1375 4850,1240 v1(4850,580) ; J3.N8 3130,1075 3130,1016.76 3157.94,988.81 3191.4,988.81 3306,874.21 3306,868.07 3509.07,665 3660,665 v1(3695,630)
  Bottom Layer w6: v1(3695,630) 3695,632.49 3703.51,641 4649,641 4715,575 4786.55,575 4791.55,580 v1(4850,580)
90: J1.26 J3.P1 | length 6172
  Top Layer w8: J3.P1 3175,331 3330,176 4274,176 4601,503 4601,1446.52 4529,1518.52 4529,1885.08 4582,1938.08 4582,2872.29 v1(4553.46,2900.83)
  Bottom Layer w8: J1.26 2830.39,3000.39 2853,3023 3237.54,3023 3280.54,3066 4165.06,3066 4166.06,3067 4422.86,3067 4469.86,3020 4549.65,2940.21 4549.65,2927.38 4552.91,2924.11 4552.91,2901.38 v1(4553.46,2900.83)
91: J1.27 J3.P2 | length 6106.2
  Bottom Layer w8: J1.27 2729.7,2754.84 2678.14,2806.4 2678.14,2964.06 2854.09,3140 3145,3140 3191,3186 3685.6,3186 3697.6,3174 4120.33,3174 4121.33,3175 4579.09,3175 4751,3003.09 4751,1766.58 4759,1758.58 4759,1414.46 4515,1170.46 4515,1014.6 4220.4,720 3420,720 3230,530 J3.P2
92: J1.28 J3.P3 | length 6330.9
  Top Layer w8: J3.P3 3350,455 3350,290.4 3422.4,218 4255.98,218 4559,521.02 4559,1429.12 4487,1501.12 4487,1902.48 4534,1949.48 v1(4534,2685)
  Bottom Layer w8: J1.28 2730.39,2965.39 2806,3041 3230.09,3041 3273.09,3084 4157.6,3084 4158.6,3085 4430.31,3085 4477.31,3038 4580,2935.31 4580,2731 v1(4534,2685)
93: J1.29 J3.P4 | length 6079.2
  Bottom Layer w8: J1.29 2630.39,2744.61 2685,2690 2745,2690 2770.14,2715.14 2770.14,2771.31 2731.45,2810 2710,2810 2692.14,2827.86 2692.14,2952.6 2829.54,3090 3228.18,3090 3258.18,3120 4142.69,3120 4143.69,3121 4556.72,3121 4709,2968.72 4709,1749.18 4717,1741.18 4717,1443.82 4465,1191.82 4465,1023.99 4211.01,770 3215,770 J3.P4
94: J1.30 J3.P5 | length 6307.4
  Top Layer w6: v1(4645,1775) 4755,1775 4797.44,1732.56 4797.44,1728.56 4808.32,1717.68 4816.32,1717.68 v1(4819,1715)
  Bottom Layer w6: J1.30 2630.39,3110.39 2761,3241 4599,3241 4811,3029 4811,1781.53 4812,1780.53 4812,1725.51 4819,1718.51 v1(4819,1715) ; J3.P5 4232.82,830 4432,1029.18 4432,1197 4690,1455 4690,1730 v1(4645,1775)
95: J1.31 J3.P6 | length 6639.9
  Top Layer w6: v1(4620,1675) 4635,1675 4700,1610 v1(4830,1610)
  Bottom Layer w6: J1.31 2480,2805.24 2480,3015 2730,3265 4620,3265 4838,3047 4838,1672.33 4830,1664.33 v1@4830,1610.51 ; J3.P6 3238.13,930 3323.13,845 4230.85,845 4420,1034.15 4420,1201.97 4678,1459.97 4678,1617 v1(4620,1675)
96: J1.32 J3.P7 J3.P8 | length 7243.4
  Top Layer w6: v1(4614.9,1649.5) 4636.41,1628 4650.38,1628 4788.38,1490 4795,1490 4797.32,1492.32 4805.4,1492.32 v1(4808.08,1495)
  Bottom Layer w6: J1.32 2530.39,3027.36 2609.91,3106.88 2614.88,3106.88 2618.39,3103.36 2618.39,2891.99 2595.64,2869.24 2595.64,2840.45 2616,2820.09 2644.79,2820.09 2665.14,2840.45 2665.14,2869.24 2642.39,2891.99 2642.39,3105.42 2765.97,3229 4594.03,3229 4799,3024.03 4799,1776.56 4800,1775.56 4800,1699.13 4808.08,1691.05 v1(4808.08,1495) ; J3.P8 J3.P7 3215,1030 3240,1005 3240,987.81 3370.81,857 4225.88,857 4404.01,1035.13 4404.01,1209.01 4666,1471 4666,1598.41 v1(4614.9,1649.5)
pads on no net: J1.33 J1.34 J1.35 J1.36 J1.37 J1.38 J1.39 J1.40 J1.41 J1.42 J1.43 J1.44 J1.45 J1.46 J1.47 J1.48 J1.49 J1.50 J1.51 J1.52 J1.53 J1.54 J1.55 J1.56 J1.57 J1.58 J1.59 J1.60 J1.61 J1.62 J1.63 J1.64 J1.65 J1.66 J2.64 J2.65 J2.66 J3.MH1 J3.MH2 J3.MH3 J3.MH4

## Silkscreen, mask and mechanical layers (free items; w line width, h text height)
Top Overlay:
  text "64 connector 1" at 485,3115.96 h80
  text "64 connector 1" at 485,1865.96 h80
  text "96 connector" at 1089.04,505 h80 r90